# Altium PCB board.PcbDoc
Units mil, origin at the board's own origin, x right, y up, seen from the top; angles counter-clockwise.
Board outline 2617 x 2703.66 mil, 2 copper layers (Top Layer, Bottom Layer); 15 components, 10 nets, 74 pads, 0 vias.
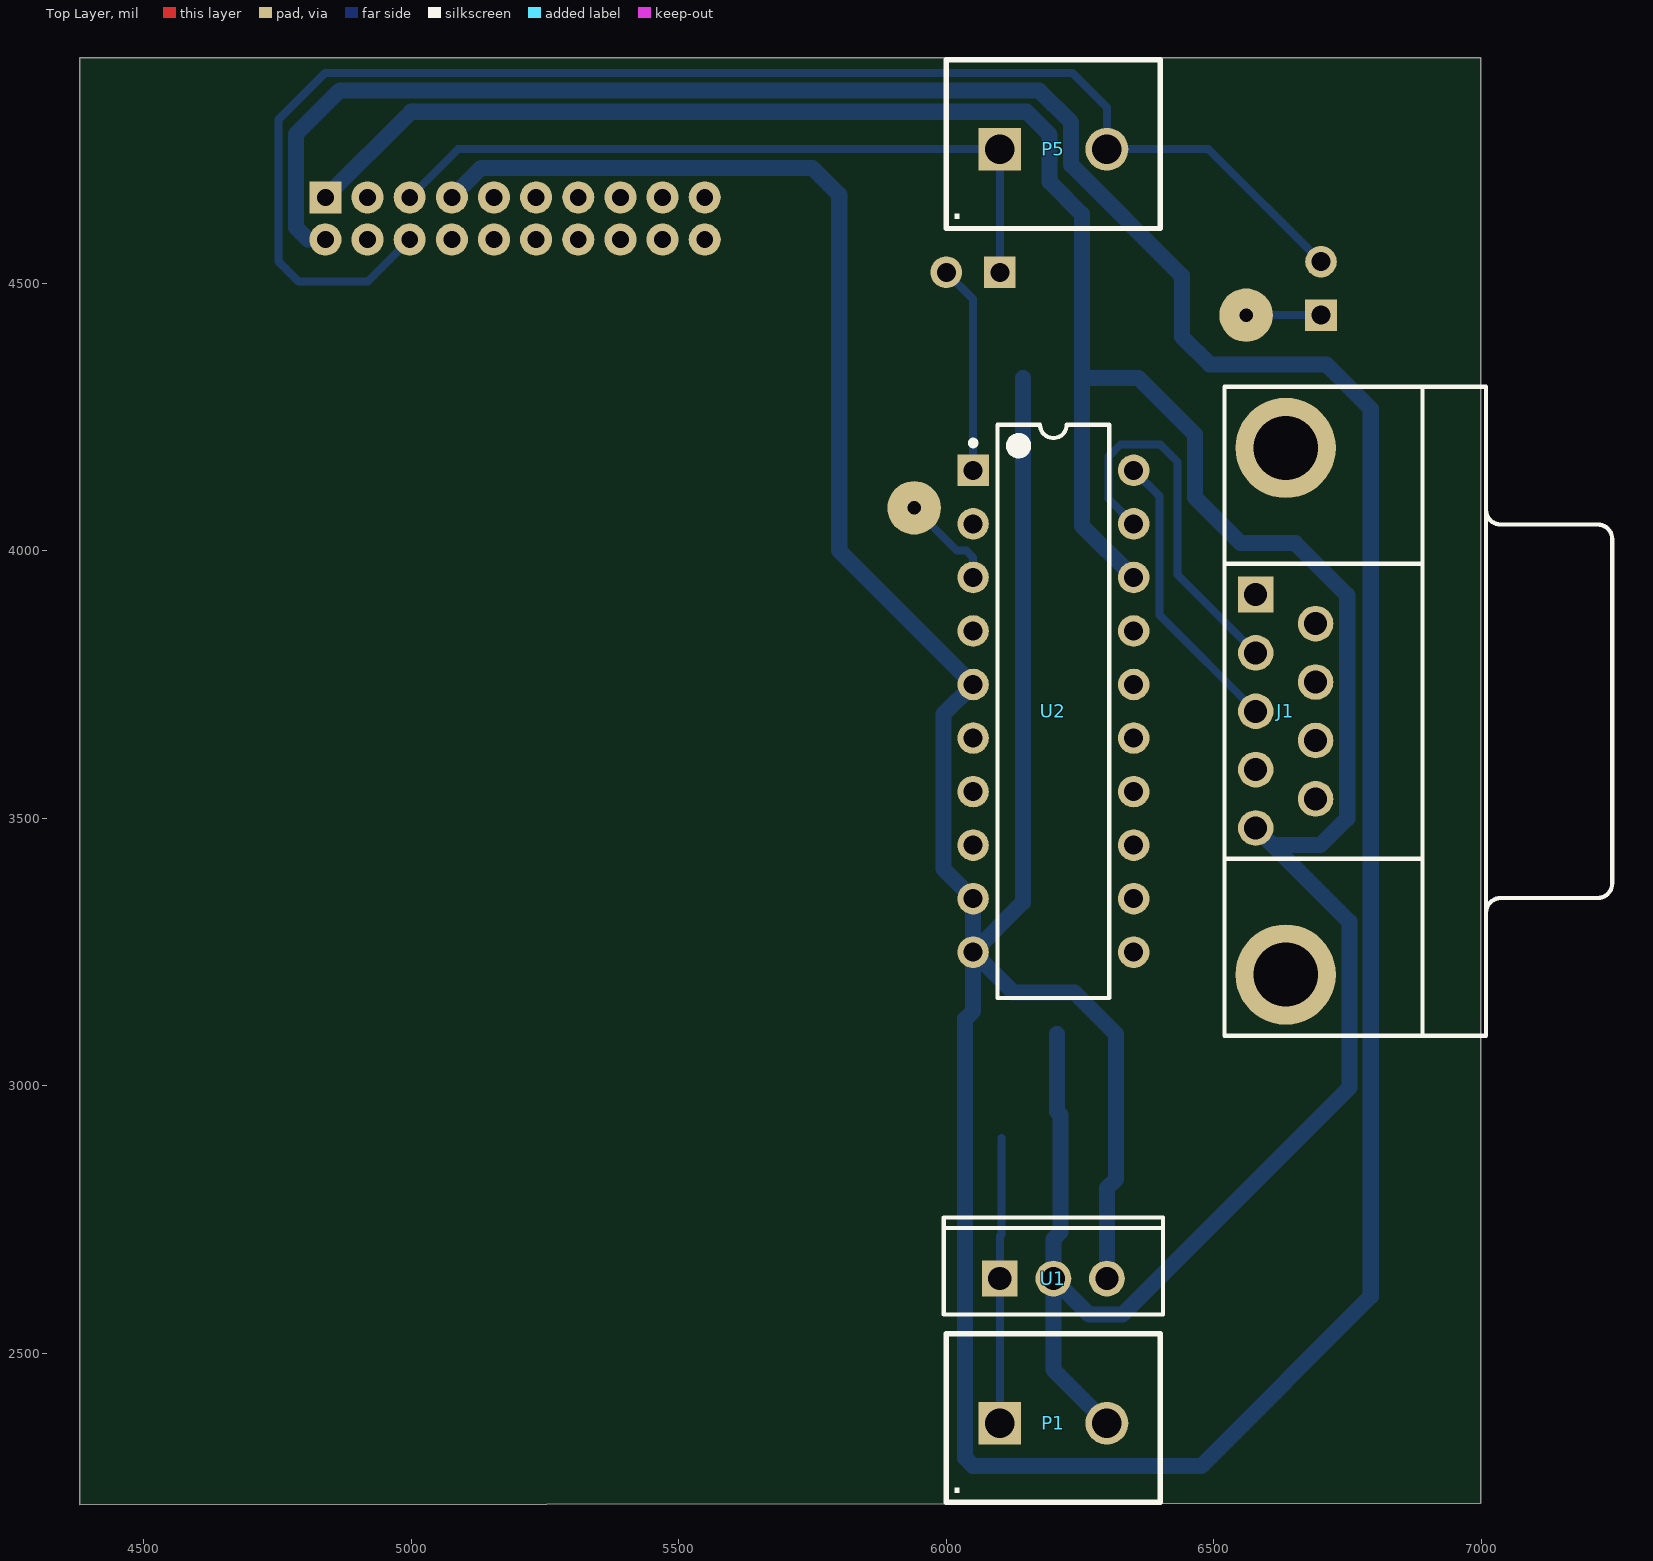
[diagram p0: Top Layer view]
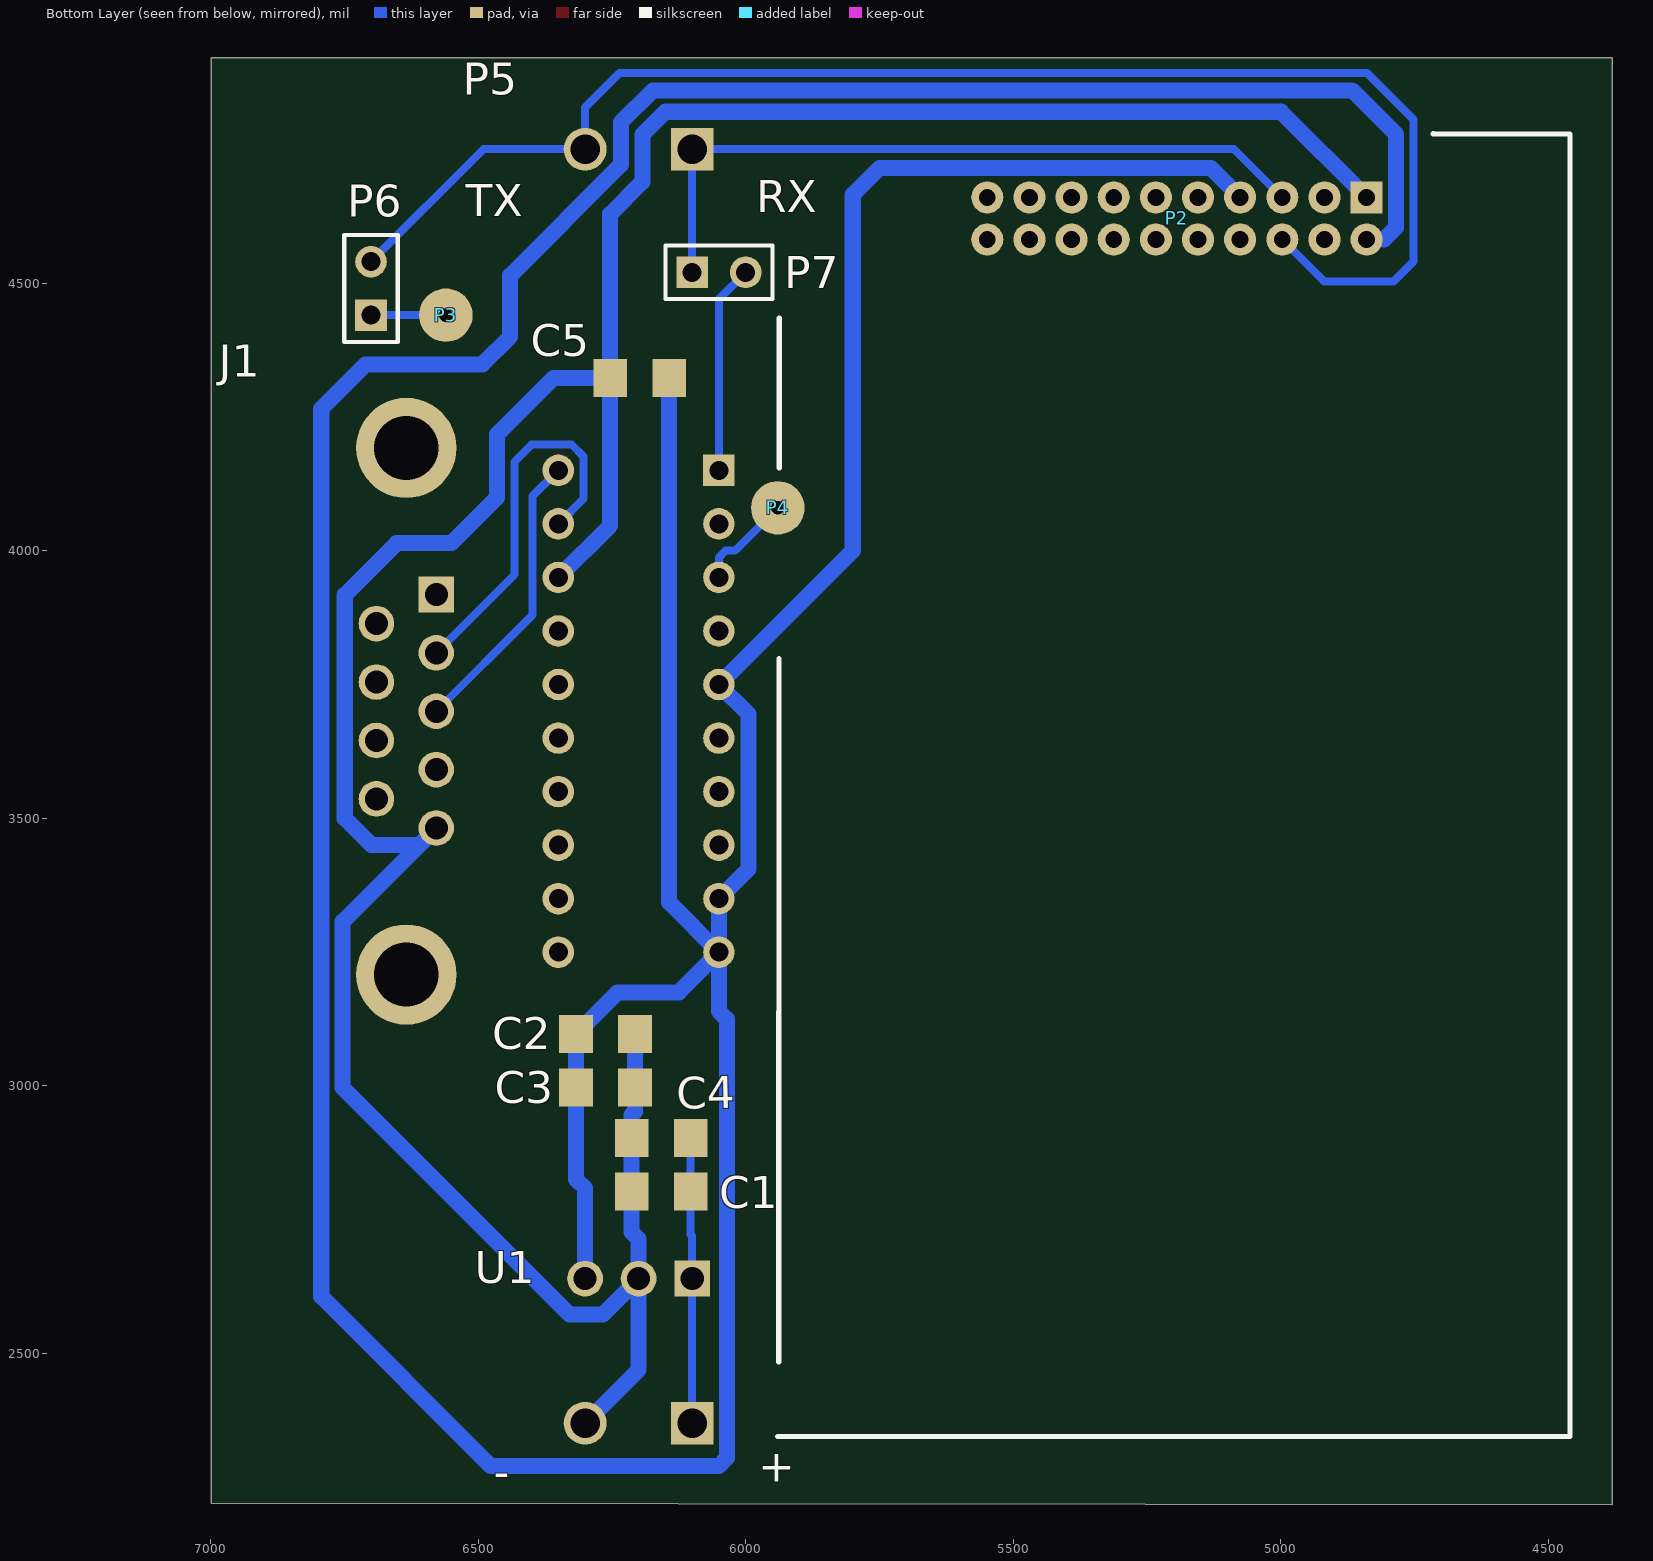
[diagram p1: Bottom Layer view, seen from below]

## Layer stack, top to bottom
Top Layer: signal copper 1.4
Dielectric: dielectric 12.6, FR-4, Dk 4.8
Bottom Layer: signal copper 1.4

## Board outline
6998,4921 6998,2220.8 4381,2217.34 4381,4921

## Design rules (kind name [scope] priority, off if disabled: settings)
Clearance [All] p1: gap=10
HoleSize [All] p1: absolutevalues=TRUE maxlimit=130 minlimit=1 maxpercent=80.000 minpercent=20.000
PolygonConnect [All] p1: connectstyle=Relief reliefconductorwidth=10 reliefentries=4 polygonreliefangle="90 Angle"
RoomDefinition schematic [InComponentClass('schematic')] p1: confinementstyle=ConfineIn formatcopy=TRUE lockcomponents=FALSE outline 7259,2210 4374,2210 4374,4925 7259,4925
RoutingLayers [All] p1: top layer_v5=FALSE bottom layer_v5=TRUE
RoutingVias [All] p1: holewidth=28 width=50 viastyle="Through Hole" minholewidth=28 minwidth=50 maxholewidth=133.86 maxwidth=50
SMDNeckDown [All] p1: percent=50.000
SilkscreenOverComponentPads [All] p1: minsilkscreentomaskgap=10
SolderMaskExpansion [All] p1: expansion=4
Width Width_Power [(InNet('GND') OR InNet('VCC'))] p1: maxlimit=30 minlimit=30 preferedwidth=30
Width [All] p2: maxlimit=15 minlimit=15 preferedwidth=15
25 further rules are at their usual default settings.

## Components (designator, comment, footprint, x,y, rotation, side; value= is the part's Value field where it differs from the comment)
C1 "10uF" 1206 6160,2800 r180 bottom
C2 "10uF" 1206 6260,3100 r0 bottom
C3 ".1uF" 1206 6260,3000 r0 bottom
C4 "1uF" 1206 6160,2900 r180 bottom
C5 ".1uF" 1206 6200,4320 r180 bottom
J1 "Read/Write" DE-9 6700,3580 r0 top
P1 "PWR" "Screw Terminal - 2" 5700,1420 r0 top
P2 "To Radio" "Header 2x20 2mm r&c pitch" 4840,4660 r0 bottom
P3 "" "Solder Pad"#1 6560,4440 r270 bottom
P4 "" "Solder Pad"#2 5940,4080 r180 bottom
P5 "UART" "Screw Terminal - 2" 5700,3800 r0 top
P6 "Header 2" HDR1X2 6700,4440 r90 bottom
P7 "Header 2" HDR1X2 6100,4520 r180 bottom
U1 "L7805CV" TO220ABN 6200,2640 r0 top
U2 "MAX3235ECPP" PP20 6200,3700 r0 top

## Footprints (in the part's own frame and the unit in brackets; to place one, negate y for a bottom-side part, rotate by r counter-clockwise, add the part's x,y. Pads: shape width x height; smd on the part's side, far side on the other; paste and mask are expansions set on the pad)
1206 [mm] "1206 passive component"
  rect 1.6x1.8 smd: 1(-1.349,0.076) 2(1.451,0.076)
DE-9 [mm] "Serial connector DE-9"
  rect 1.69x1.69 hole 1.092: 1(-3.097,8.588)
  round 1.69 hole 1.092: 2(-3.097,5.818) 3(-3.097,3.048) 4(-3.097,0.278) 5(-3.097,-2.492) 6(-0.257,7.203) 7(-0.257,4.433) 8(-0.257,1.663) 9(-0.257,-1.107)
  round 4.76 hole 3.048: 10(-1.677,15.543) 11(-1.677,-9.447)
  silkscreen extent -4.58,-12.35 13.82,18.45
HDR1X2 [mm] "Connector; Header; 2 Position"
  rect 1.5x1.5 hole 0.9: 1(0,0)
  round 1.5 hole 0.9: 2(2.54,0)
  silkscreen extent -1.27,-1.27 3.81,1.27
"Header 2x20 2mm r&c pitch" [mil] "2 row, 20 pin through-hole header with a row and column pitch of 2mm"
  rect 60x60 hole 31.5: 1(0,0)
  round 60 hole 31.5: 2(0,78.74) 3(78.74,0) 4(78.74,78.74) 5(157.48,0) 6(157.48,78.74) 7(236.22,0) 8(236.22,78.74) 9(314.96,0) 10(314.96,78.74) 11(393.7,0) 12(393.7,78.74) 13(472.44,0) 14(472.44,78.74) 15(551.18,0) 16(551.18,78.74) 17(629.92,0) 18(629.92,78.74) 19(708.66,0) 20(708.66,78.74)
PP20 [mm] "DIP, 20-Leads, Row Spacing 7.62mm, Pitch 2.54mm, Body 26.16x7.24mm"
  rect 1.5x1.5 hole 0.9: 1(-3.81,11.43)
  round 1.5 hole 0.9: 2(-3.81,8.89) 3(-3.81,6.35) 4(-3.81,3.81) 5(-3.81,1.27) 6(-3.81,-1.27) 7(-3.81,-3.81) 8(-3.81,-6.35) 9(-3.81,-8.89) 10(-3.81,-11.43) 11(3.81,-11.43) 12(3.81,-8.89) 13(3.81,-6.35) 14(3.81,-3.81) 15(3.81,-1.27) 16(3.81,1.27) 17(3.81,3.81) 18(3.81,6.35) 19(3.81,8.89) 20(3.81,11.43)
  silkscreen extent -3.93,-13.6 2.65,13.6, body extent -3.3,-13.57 3.3,13.57, height 4.58
"Screw Terminal - 2" [mil] "A through-hole screw terminal with two circuits"
  rect 80x80 hole 55.12: 1(400,950)
  round 80 hole 55.12: 2(600,950)
  silkscreen extent 300,802 700,1117, body extent 300,805 700,1115, height 394
"Solder Pad"#1 [mil] "A solder pad for manually jumping traces"
  round 100 hole 25 unplated: 1(0,0)
"Solder Pad"#2 [mil] "A solder pad for manually jumping traces"
  round 100 hole 25: 1(0,0)
TO220ABN [mm] "TO, Thru-Hole, Vertical, Heatsink Mounted; 3 In-Line Leads; Pitch 2.54 mm; Pin sequence 1, 3, 2"
  rect 1.7x1.7 hole 1.1: 1(-2.54,0)
  round 1.7 hole 1.1: 2(2.54,0) 3(0,0)
  silkscreen extent -5.2,-1.7 5.2,2.9

## Part data
C1 C2 C3 C4 C5: library part Cap, "Capacitor"
J1: library part "D Connector 9", "Receptacle Assembly, 9 Position, Right Angle"
P1 P5: library part "Header 2", "Header, 2-Pin"
P2: library part "Header 20X2", "Header, 20-Pin, Dual row"
P3 P4: library part "Solder Pad", "A pad to solder a wire connection to"
P6 P7: "Header, 2-Pin"
U1: "Positive Voltage Regulator"
U2: "±15kV ESD-Protected, 1µA, 250kbps, 5V, Dual RS-232 Transceiver with Internal Capacitor"

## Nets (pads, with @x,y where several pads share a name; then routed paths per layer and width w, separated by ;. In a path a pad name is that pad's centre, name@x,y a point inside that pad or via, vN(x,y) a via of type N, cw(c..) or ccw(c..) an arc to the next point about the centre after c; other vN are vias at no path point)
GND: C1.1 C2.1 C3.1 C4.1 C5.1 J1.5 P1.2 P2.1 U1.3 U2.18 | length 5774.3
  Bottom Layer w30: P2.1 5000,4820 6150,4820 6193,4777 6193,4689 6253.12,4628.88 C5.1 ; C2.1 C3.1 6206.88,2952.24 6213.12,2946 C4.1 6213.12,2852 C1.1 6213.12,2727.12 6200,2714 U1.3 ; P1.2 6200,2470 U1.3 ; U2.18 6253.12,4046.88 C5.1 ; U1.3 6267,2573 6329,2573 6753,2997 6753,3306.97 6609.97,3450 ; C5.1 6359,4323 6465,4217 6465,4099 6550,4014 6652,4014 6749,3917 6749,3500 6699,3450 6609.97,3450 ; 6609.97,3450 J1.5 6609.97,3450
NetC1_2: C1.2 C4.2 P1.1 U1.1 | length 534.2
  Bottom Layer w15: P1.1 6100,2504 U1.1 6100,2720 6102.88,2722.88 C1.2 6102.88,2852 C4.2
NetJ1_2: J1.2 U2.19 | length 714.3
  Bottom Layer w15: U2.19 6302.97,4097.03 6302.97,4175.97 6325,4198 6400,4198 6432,4166 6432,3955.13 J1.2
NetJ1_3: J1.3 U2.20 | length 544.5
  Bottom Layer w15: U2.20 6398,4102 6398,3880.08 J1.3
NetP2_5: P2.5 P5.1 P7.1 | length 1369.8
  Bottom Layer w15: P2.5 5087.48,4750 P5.1 P7.1
NetP2_6: P2.6 P5.2 P6.2 | length 2733.6
  Bottom Layer w15: P2.6 4919.22,4503 4789.61,4503 4752.5,4540.11 4752.5,4805.8 4839.2,4892.5 6235.5,4892.5 6300,4828 P5.2 6490,4750 P6.2
NetP3_1: P3.1 P6.1 | length 140
  Bottom Layer w15: P3.1 P6.1
NetP4_1: P4.1 U2.3 | length 185.8
  Bottom Layer w15: P4.1 6020,4000 6037.5,4000 6050,3987.5 U2.3
NetP7_2: P7.2 U2.1 | length 390.7
  Bottom Layer w15: P7.2 6050,4470 U2.1
VCC: C2.2 C3.2 C5.2 P2.2 P2.7 U1.2 U2.5 U2.9 U2.10 | length 10382.1
  Bottom Layer w30: P2.2 4807.74,4581.26 4785,4604 4785,4778 4867,4860 6173,4860 6233,4800 6233,4721 6440,4514 6440,4400 6492,4348 6710,4348 6793,4265 6793,2607 6476,2290 6050,2290 6035,2305 6035,3125 6050,3140 U2.10 ; P2.7 5131.22,4715 5750,4715 5800,4665 5800,4000 U2.5 5995,3695 5995,3405 U2.9 U2.10 ; C5.2 6142.88,3342.88 U2.10 ; U1.2 6300,2809 6317.12,2826.12 C3.2 C2.2 6239.12,3175 6125,3175 U2.10
pads on no net: J1.1 J1.4 J1.6 J1.7 J1.8 J1.9 J1.10 J1.11 P2.3 P2.4 P2.8 P2.9 P2.10 P2.11 P2.12 P2.13 P2.14 P2.15 P2.16 P2.17 P2.18 P2.19 P2.20 U2.2 U2.4 U2.6 U2.7 U2.8 U2.11 U2.12 U2.13 U2.14 U2.15 U2.16 U2.17

## Silkscreen, mask and mechanical layers (free items; w line width, h text height)
Bottom Overlay:
  lines w10: 4715.75,4779.15 4460,4778 4460,2345 5940,2345 ; 5937.6,4154.7 5937.6,4434.35 ; 5937.8,3798.35 5938.35,2484.7
  text "RX" at 5979.85,4632.5 h60
  text "TX" at 6522.75,4624.6 h60
  text "+" at 5976.95,2260.55 h60
  text "-" at 6470.85,2249 h60
Mechanical 1:
  lines w10: 4386.05,2218.55 7004.1,2218.55 6999.85,2222.8 6999.85,4921.55 6995.6,4917.3 4390.3,4917.3 4386.05,4913.05 4386.05,2218.55